# Altium PCB PCB1.PcbDoc
Units mm, origin at the board's own origin, x right, y up, seen from the top; angles counter-clockwise.
Board outline 100 x 68 mm, 2 copper layers (Top Layer, Bottom Layer); 51 components, 54 nets, 211 pads, 15 vias.
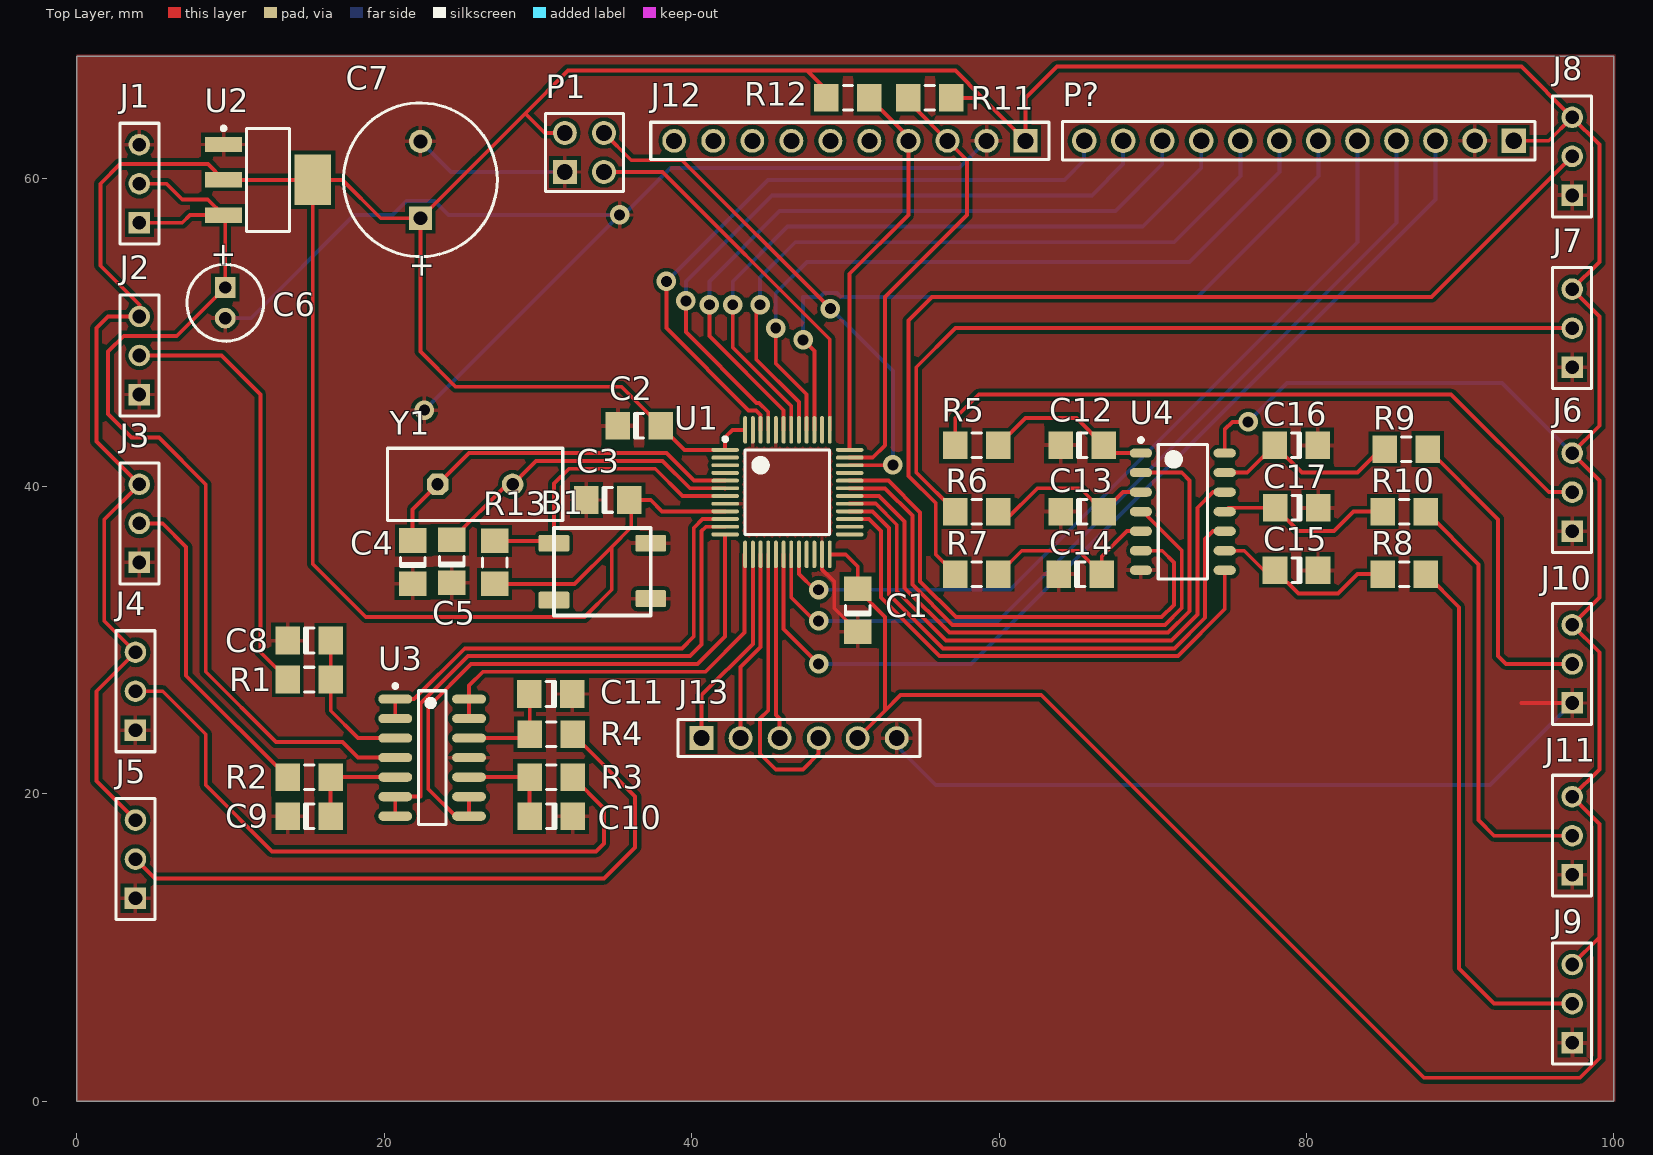
[diagram p0: Top Layer view]
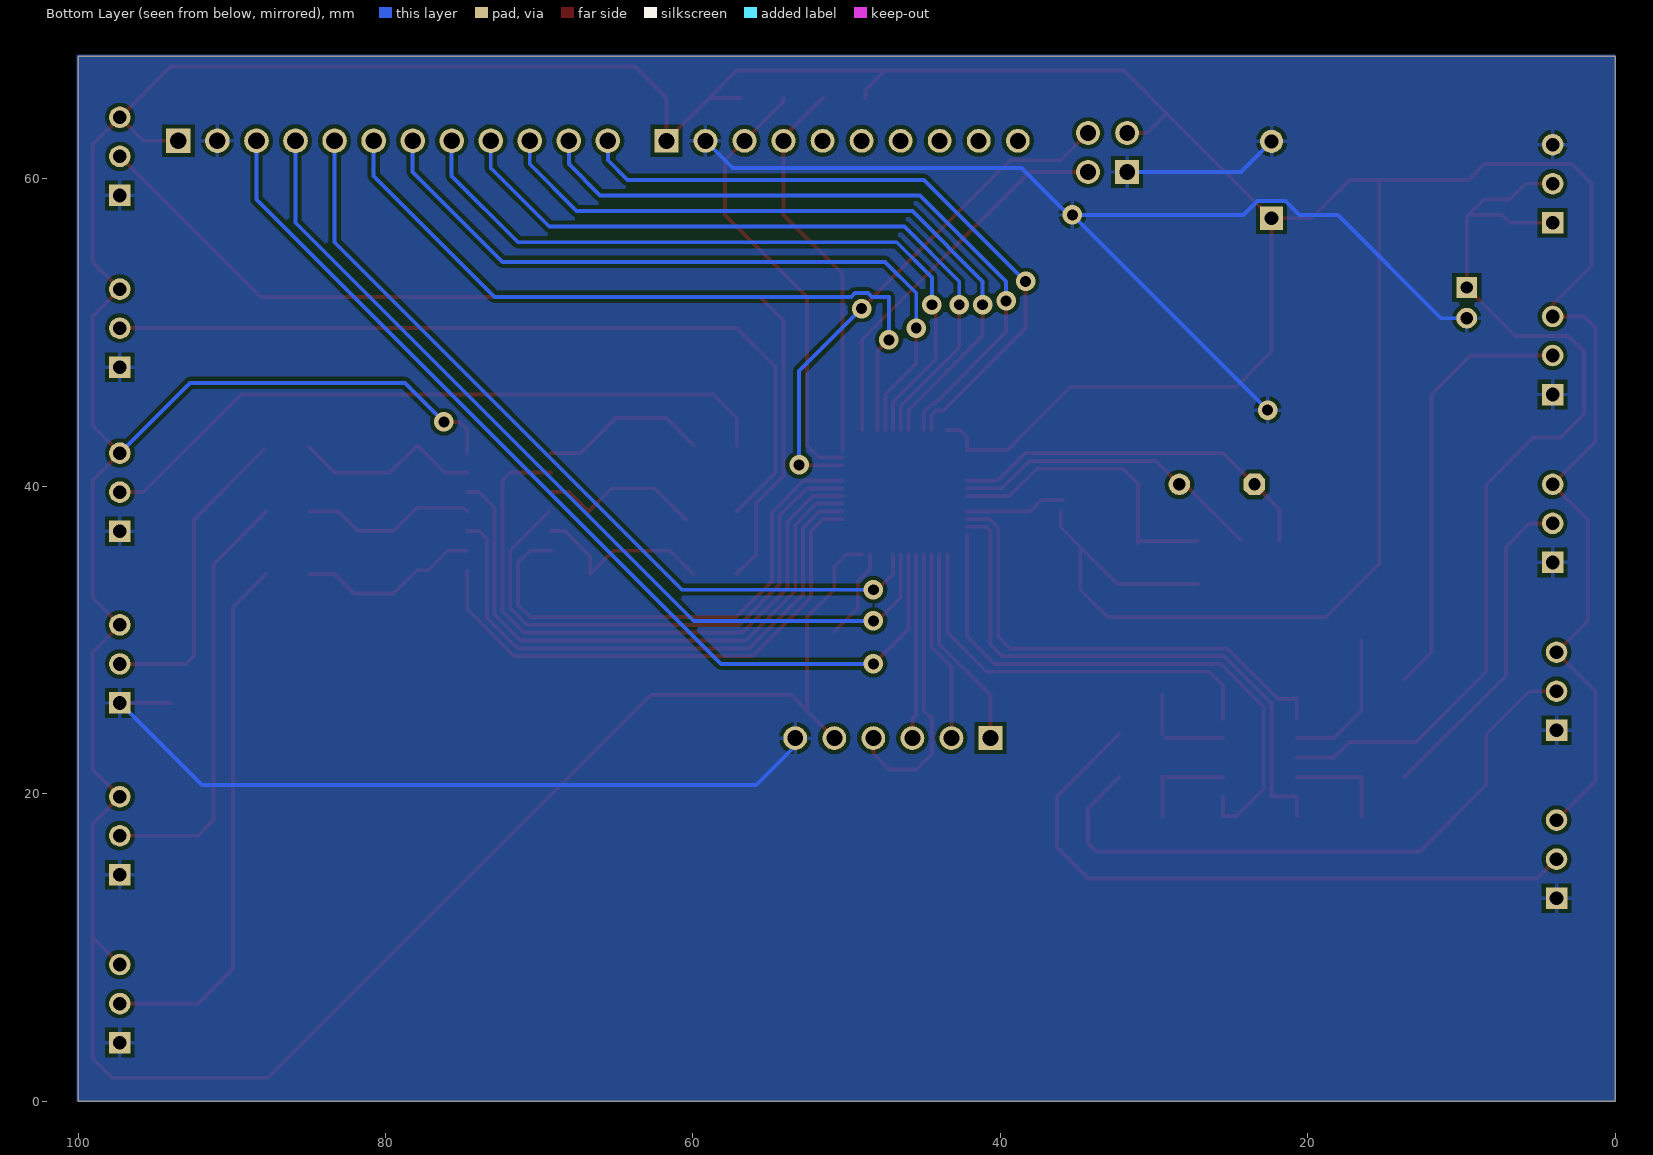
[diagram p1: Bottom Layer view, seen from below]

## Layer stack, top to bottom
Top Solder: solder mask 0.0102, Solder Resist, Dk 3.5
Top Layer: signal copper 0.0356
Dielectric 1: dielectric 0.32, FR-4, Dk 4.8
Bottom Layer: signal copper 0.0356
Bottom Solder: solder mask 0.0102, Solder Resist, Dk 3.5

## Board outline
0,0 100,0 100,67.996 0,67.996

## Design rules (kind name [scope] priority, off if disabled: settings)
Clearance [All] p1: gap=0.254 ignorepadtopadclearanceinfootprint=FALSE except(0: Arc-Hole Track-Hole SMDPad-Hole THPad-Hole Via-Hole Fill-Hole Poly-Hole Region-Hole Text-Hole; 0.2: Arc-Text Track-Text SMDPad-Text THPad-Text Via-Text Fill-Text Poly-Text Region-Text Text-Text; 0.24: Arc-Arc Arc-Track Arc-SMDPad Track-Track Track-SMDPad; 0.25: SMDPad-SMDPad)
PolygonConnect [All] p1: connectstyle=Relief reliefconductorwidth=0.254 reliefentries=4 polygonreliefangle="90 Angle" airgapwidth=0.254
RoutingVias [All] p1: holewidth=0.711 width=1.27 viastyle="Through Hole" minholewidth=0.711 minwidth=1.27 maxholewidth=0.711 maxwidth=1.27
SilkToSilkClearance [All] p1: silktosilkclearance=0.2
SolderMaskExpansion [All] p1: expansion=0
Width [All] p1: maxlimit=0.254 minlimit=0.254 preferedwidth=0.254
29 further rules are at their usual default settings.

## Components (designator, comment, footprint, x,y, rotation, side; value= is the part's Value field where it differs from the comment)
B1 "Reset Button" "SMD Mini Push Button Switch 4 Pin" 31.038,32.601 r0 top
C1 "C1206" 1206 50.8,31.945 r90 top value=100pF
C2 "C1206" 1206 36.576,43.942 r0 top value=100pF
C3 "C1206" 1206 34.544,39.116 r0 top value=100pF
C4 "C1206" 1206 21.844,35.076 r90 top value=22pf
C5 "C1206" 1206 24.384,35.126 r90 top value=22pf
C6 "EKA00AA210L00" CAPPR2-5X11 9.652,51.94 r270 top value=10uF
C7 "EKA00DD222S00" CAPPR5-10X16 22.352,59.944 r90 top value=22uF
C8 "C1206" 1206 15.11,29.972 r0 top value=100pF
C9 "C1206" 1206 15.116,18.542 r0 top value=100pF
C10 "C1206" 1206 30.858,18.542 r180 top value=100pF
C11 "C1206" 1206 30.836,26.492 r180 top value=100pF
C12 "C1206" 1206 65.402,42.672 r0 top value=100pF
C13 "C1206" 1206 65.402,38.354 r0 top value=100pF
C14 "C1206" 1206 65.278,34.29 r0 top value=100pF
C15 "C1206" 1206 79.347,34.544 r180 top value=100pF
C16 "C1206" 1206 79.321,42.672 r180 top value=100pF
C17 "C1206" 1206 79.353,38.608 r180 top value=100pF
J1 "Power" SMTC-BCS-103-X-S-TE 4.064,57.15 r90 top
J2 "Suspension 1" SMTC-BCS-103-X-S-TE 4.064,45.974 r90 top
J3 "Suspension 2" SMTC-BCS-103-X-S-TE 4.064,35.052 r90 top
J4 "Suspension 3" SMTC-BCS-103-X-S-TE 3.81,24.13 r90 top
J5 "Suspension 4" SMTC-BCS-103-X-S-TE 3.81,13.208 r90 top
J6 "BCS-103-L-S-TE" SMTC-BCS-103-X-S-TE 97.282,37.084 r90 top
J7 "BCS-103-L-S-TE" SMTC-BCS-103-X-S-TE 97.282,47.752 r90 top
J8 "BCS-103-L-S-TE" SMTC-BCS-103-X-S-TE 97.282,58.928 r90 top
J9 "BCS-103-L-S-TE" SMTC-BCS-103-X-S-TE 97.282,3.81 r90 top
J10 "BCS-103-L-S-TE" SMTC-BCS-103-X-S-TE 97.282,25.908 r90 top
J11 "BCS-103-L-S-TE" SMTC-BCS-103-X-S-TE 97.282,14.732 r90 top
J12 "MPU9250" SMTC-SSW-110-03-X-S 61.722,62.484 r180 top
J13 "SD Card" SMTC-SSW-106-02-X-S 40.64,23.622 r0 top
P1 "HW-02-12-T-D-750-100" SMTC-HW-02-12-X-D-750-100 31.75,60.452 r0 top
P? "PHT-112-02-L-S" SMTC-PHT-112-02-X-S 93.472,62.484 r180 top
R1 "ERJ8GE" 8-1206 15.116,27.432 r0 top
R2 "ERJ8GE" 8-1206 15.11,21.082 r0 top
R3 "ERJ8GE" 8-1206 30.858,21.082 r180 top
R4 "ERJ8GE" 8-1206 30.864,23.876 r180 top
R5 "ERJ8GE" 8-1206 58.544,42.672 r0 top
R6 "ERJ8GE" 8-1206 58.55,38.354 r0 top
R7 "ERJ8GE" 8-1206 58.55,34.29 r0 top
R8 "ERJ8GE" 8-1206 86.36,34.29 r180 top
R9 "ERJ8GE" 8-1206 86.484,42.418 r180 top
R10 "ERJ8GE" 8-1206 86.36,38.354 r180 top
R11 "ERJ8GE" 8-1206 55.496,65.278 r180 top
R12 "ERJ8GE" 8-1206 50.162,65.278 r0 top
R13 "ERJ8GE" 8-1206 27.178,35.052 r90 top
U1 "STM32F030C6T6" STM-LQFP48_N 46.228,39.624 r0 top
U2 "LD1117AS33TR" SOT-223_N 12.446,59.944 r0 top
U3 "LM324MX" M14A_N 23.114,22.352 r0 top
U4 "SN74HC14D" D0014A_N 71.951,38.354 r0 top
Y1 "ECS-10-13-1" HC-49U 25.908,40.132 r0 top

## Footprints (in the part's own frame and the unit in brackets; to place one, negate y for a bottom-side part, rotate by r counter-clockwise, add the part's x,y. Pads: shape width x height; smd on the part's side, far side on the other; paste and mask are expansions set on the pad)
8-1206 [mm] "Chip Resistor; Body 3.1 x 1.6 mm (LxW typ)"
  rect 1.6x1.8 smd: 1(-1.4,0) 2(1.4,0)
  silkscreen extent -0.3,-0.8 0.3,0.8
1206 [mm] "Chip Capacitor; Body 3.2 x 1.6 mm (LxW typ)"
  rect 1.6x1.8 smd: 1(-1.4,0) 2(1.4,0)
  silkscreen extent -0.3,-0.8 0.3,0.8
CAPPR2-5X11 [mm] "Capacitor, Electrolytic, Radial; Body 5 x 11 mm (Dia.xH typ); Pin Spacing 2 mm (typ)"
  rect 1.35x1.35 hole 0.8: 1(-1,0)
  round 1.35 hole 0.8: 2(1,0)
  silkscreen extent -2.5,-2.5 2.5,2.5
CAPPR5-10X16 [mm] "Capacitor, Electrolytic, Radial; Body 10 x 16 mm (Dia.xH typ); Pin Spacing 5 mm (typ)"
  rect 1.5x1.5 hole 0.9: 1(-2.5,0)
  round 1.5 hole 0.9: 2(2.5,0)
  silkscreen extent -5,-5 5,5
D0014A_N [mm] "SOIC, 14-Leads, Body 8.75x4mm, Pitch 1.27mm, IPC Medium Density"
  oval 1.45x0.6 smd: 1(-2.725,3.81) 2(-2.725,2.54) 3(-2.725,1.27) 4(-2.725,0) 5(-2.725,-1.27) 6(-2.725,-2.54) 7(-2.725,-3.81) 8(2.725,-3.81) 9(2.725,-2.54) 10(2.725,-1.27) 11(2.725,0) 12(2.725,1.27) 13(2.725,2.54) 14(2.725,3.81)
  silkscreen extent -2.85,-4.38 1.6,4.78, body extent -3.02,-4.32 3.02,4.32, height 1.75
HC-49U [mm] "Quartz Crystal, Thru-Hole; 2 Leads; Body 11.35 x 4.65 x 13.46 mm (LxWxH max)"
  oct 1.4x1.4 hole 0.8: 1(-2.44,0)
  round 1.4 hole 0.8: 2(2.44,0)
  silkscreen extent -5.7,-2.35 5.7,2.35
M14A_N [mm] "SOIC, 14-Leads, Body 8.6x3.9mm, Pitch 1.27mm, IPC Medium Density"
  oval 2.2x0.6 smd: 1(-2.4,3.81) 2(-2.4,2.54) 3(-2.4,1.27) 4(-2.4,0) 5(-2.4,-1.27) 6(-2.4,-2.54) 7(-2.4,-3.81) 8(2.4,-3.81) 9(2.4,-2.54) 10(2.4,-1.27) 11(2.4,0) 12(2.4,1.27) 13(2.4,2.54) 14(2.4,3.81)
  silkscreen extent -2.52,-4.35 0.9,4.78, body extent -2,-4.37 2,4.37, height 1.75
"SMD Mini Push Button Switch 4 Pin" [mm]
  rrect20% 2x1.1 smd: 1(0,0) 1(0,3.7) 2(6.3,0.1) 2(6.3,3.7)
  silkscreen extent 0,-1 6.3,4.7
SMTC-BCS-103-X-S-TE [mm] "Box Connector Socket Strip, 1x3 Pins, Vertical, 2.54mm Pitch, Female"
  rect 1.4x1.4 hole 0.89: 1(0,0)
  round 1.4 hole 0.89: 2(2.54,0) 3(5.08,0)
  silkscreen extent -1.4,-1.27 6.48,1.27, body extent -1.27,-1.27 6.35,1.27, height 7.37
SMTC-HW-02-12-X-D-750-100 [mm] "High Temp Terminal Body, 2x2 Pins, Vertical, 2.54mm Pitch, Male"
  rect 1.55x1.55 hole 1.02: 1(0,0)
  round 1.55 hole 1.02: 2(0,2.54) 3(2.54,0) 4(2.54,2.54)
  silkscreen extent -1.27,-1.27 3.81,3.81, body extent -1.27,-1.27 3.81,3.81, height 23.62
SMTC-PHT-112-02-X-S [mm] "Press Fit Socket Assembly, 1x12 Pins, Vertical, 2.54mm Pitch, Male"
  rect 1.6x1.6 hole 1.081: 1(0,0)
  round 1.6 hole 1.081: 2(2.54,0) 3(5.08,0) 4(7.62,0) 5(10.16,0) 6(12.7,0) 7(15.24,0) 8(17.78,0) 9(20.32,0) 10(22.86,0) 11(25.4,0) 12(27.94,0)
  silkscreen extent -1.4,-1.24 29.34,1.24, body extent -1.26,-1.25 29.2,1.25, height 10.92
SMTC-SSW-106-02-X-S [mm] "SQ Post Socket, 1x6 Pins, Vertical, 2.54mm Pitch, Female"
  rect 1.55x1.55 hole 1.04: 1(0,0)
  round 1.55 hole 1.04: 2(2.54,0) 3(5.08,0) 4(7.62,0) 5(10.16,0) 6(12.7,0)
  silkscreen extent -1.53,-1.2 14.23,1.2, body extent -1.52,-1.21 14.22,1.21, height 8.51
SMTC-SSW-110-03-X-S [mm] "SQ Post Socket, 1x10 Pins, Vertical, 2.54mm Pitch, Female"
  rect 1.55x1.55 hole 1.04: 1(0,0)
  round 1.55 hole 1.04: 2(2.54,0) 3(5.08,0) 4(7.62,0) 5(10.16,0) 6(12.7,0) 7(15.24,0) 8(17.78,0) 9(20.32,0) 10(22.86,0)
  silkscreen extent -1.53,-1.2 24.39,1.2, body extent -1.52,-1.21 24.38,1.21, height 8.51
SOT-223_N [mm] "SOT223, 4-Leads, Body 6.5x3.5mm, Pitch 2.3mm, Lead Span 7mm, IPC Medium Density"
  rect 2.4x1 smd: 1(-2.9,2.3) 2(-2.9,0) 3(-2.9,-2.3)
  rect 2.4x3.3 smd: 4(2.9,0)
  silkscreen extent -3.02,-3.35 1.4,3.47, body extent -1.85,-3.35 1.85,3.35, height 1.8
STM-LQFP48_N [mm] "QFP, 48-Leads, Body 7x7mm, Pitch 0.5mm, IPC Medium Density"
  oval 1.8x0.25 smd: 1(-4.05,2.75) 2(-4.05,2.25) 3(-4.05,1.75) 4(-4.05,1.25) 5(-4.05,0.75) 6(-4.05,0.25) 7(-4.05,-0.25) 8(-4.05,-0.75) 9(-4.05,-1.25) 10(-4.05,-1.75) 11(-4.05,-2.25) 12(-4.05,-2.75) 25(4.05,-2.75) 26(4.05,-2.25) 27(4.05,-1.75) 28(4.05,-1.25) 29(4.05,-0.75) 30(4.05,-0.25) 31(4.05,0.25) 32(4.05,0.75) 33(4.05,1.25) 34(4.05,1.75) 35(4.05,2.25) 36(4.05,2.75)
  oval 0.25x1.8 smd: 13(-2.75,-4.05) 14(-2.25,-4.05) 15(-1.75,-4.05) 16(-1.25,-4.05) 17(-0.75,-4.05) 18(-0.25,-4.05) 19(0.25,-4.05) 20(0.75,-4.05) 21(1.25,-4.05) 22(1.75,-4.05) 23(2.25,-4.05) 24(2.75,-4.05) 37(2.75,4.05) 38(2.25,4.05) 39(1.75,4.05) 40(1.25,4.05) 41(0.75,4.05) 42(0.25,4.05) 43(-0.25,4.05) 44(-0.75,4.05) 45(-1.25,4.05) 46(-1.75,4.05) 47(-2.25,4.05) 48(-2.75,4.05)
  silkscreen extent -4.17,-2.75 2.75,3.57, body extent -3.5,-3.5 3.5,3.5, height 1.6

## Part data
B1: library part "SMD Mini Push Button Switch 4 Pin"
C1 C2 C3 C4 C5 C8 C9 C10 C11 C12 C13 C14 C15 C16 C17: "Ceramic Chip Capacitor - Standard", PackageDocument=Mar-2001, Code_IPC="3216 [1206]", Code_JEITA=1206, ComponentLink1Description="Manufacturer Link", ComponentLink1URL=http://www.kemet.com/, ComponentLink2Description=Datasheet, ComponentLink2URL=http://www.kemet.com/kemet/web/homepage/kechome.nsf/vapubfilesname/F3102TA.pdf/$file/F3102TA.pdf, DatasheetDocument=Mar-2001, LatestRevisionDate=19-Mar-2004, LatestRevisionNote="Silkscreen size reduced.", PackageReference=1206, Published=17-Jul-2002, Publisher="Altium Limited"
C6: "Aluminum Electrolytic Capacitor, Radial Style with Long Leads: 10uF, 100V", ComponentLink1Description="Manufacturer Link", ComponentLink1URL=http://www.vishay.com/, ComponentLink2Description=Datasheet, ComponentLink2URL=http://www.vishay.com/docs/25014/eka.pdf, DatasheetDocument=20-Feb-2001, DrillSize="Nominal, Rounded To The Nearest 0.1mm", Note="Refer to Manufacturer's Data Sheets for other lead formations", PackageReference=CAPPR2-5X11, Published=19-Mar-2004, Publisher="Altium Limited"
C7: "Aluminum Electrolytic Capacitor, Radial Style with Long Leads: 22uF, 200V", ComponentLink1Description="Manufacturer Link", ComponentLink1URL=http://www.vishay.com/, ComponentLink2Description=Datasheet, ComponentLink2URL=http://www.vishay.com/docs/25014/eka.pdf, DatasheetDocument=20-Feb-2001, DrillSize="Nominal, Rounded To The Nearest 0.1mm", Note="Refer to Manufacturer's Data Sheets for other lead formations", PackageReference=CAPPR5-10X16, Published=19-Mar-2004, Publisher="Altium Limited"
J1: library part BCS-103-F-S-TE, "Tiger Claw(TM) Pass-Through Socket, Vertical, -55 to 125 degC, 2.54 mm Pitch, 3-Pin, Female, RoHS", Manufacturer=Samtec, Temperature Range="-55 to 125 degC", ComponentLink1Description="Manufacturer URL", ComponentLink1URL=http://www.samtec.com, ComponentLink2Description=Datasheet, ComponentLink2URL=http://www.samtec.com/documents/webfiles/pdf/BCS.PDF, ComponentLink3Description="Package Specification", ComponentLink3URL=http://www.samtec.com/documents/webfiles/cpdf/BCS-1XX-XXX-X-XX-XXX-MKT.pdf, DatasheetVersion=F-214, Mounting Technology=Through-hole, Orientation=Vertical, PackageDescription="Box Connector Socket Strip", PackageReference=BCS-103-X-S-TE, PackageVersion="BV, 9/1991", PartNumber=BCS-103-F-S-TE, Pitch="2.54 mm", RoHS=True
J2 J3 J4 J5: library part BCS-103-L-S-TE, "Tiger Claw(TM) Pass-Through Socket, Vertical, -55 to 125 degC, 2.54 mm Pitch, 3-Pin, Female, RoHS", Manufacturer=Samtec, Supplier Part Number 1=SAM1011-03-ND, Temperature Range="-55 to 125 degC", ComponentLink1Description="Manufacturer URL", ComponentLink1URL=http://www.samtec.com, ComponentLink2Description=Datasheet, ComponentLink2URL=http://www.samtec.com/documents/webfiles/pdf/BCS.PDF, ComponentLink3Description="Package Specification", ComponentLink3URL=http://www.samtec.com/documents/webfiles/cpdf/BCS-1XX-XXX-X-XX-XXX-MKT.pdf, DatasheetVersion=F-214, Mounting Technology=Through-hole, Orientation=Vertical, PackageDescription="Box Connector Socket Strip", PackageReference=BCS-103-X-S-TE, PackageVersion="BV, 9/1991", PartNumber=BCS-103-L-S-TE, Pitch="2.54 mm", RoHS=True, Supplier 1=Digi-Key, Supplier 2=Newark, Supplier Part Number 2=11P3213
J6 J7 J8 J9 J10 J11: "Tiger Claw(TM) Pass-Through Socket, Vertical, -55 to 125 degC, 2.54 mm Pitch, 3-Pin, Female, RoHS", Manufacturer=Samtec, Supplier Part Number 1=SAM1011-03-ND, Temperature Range="-55 to 125 degC", ComponentLink1Description="Manufacturer URL", ComponentLink1URL=http://www.samtec.com, ComponentLink2Description=Datasheet, ComponentLink2URL=http://www.samtec.com/documents/webfiles/pdf/BCS.PDF, ComponentLink3Description="Package Specification", ComponentLink3URL=http://www.samtec.com/documents/webfiles/cpdf/BCS-1XX-XXX-X-XX-XXX-MKT.pdf, DatasheetVersion=F-214, Mounting Technology=Through-hole, Orientation=Vertical, PackageDescription="Box Connector Socket Strip", PackageReference=BCS-103-X-S-TE, PackageVersion="BV, 9/1991", PartNumber=BCS-103-L-S-TE, Pitch="2.54 mm", RoHS=True, Supplier 1=Digi-Key, Supplier 2=Newark, Supplier Part Number 2=11P3213
J12: library part SSW-110-03-T-S, "SQ Post Socket, Through-hole, Vertical, -55 to 105 degC, 2.54 mm Pitch, 10-Pin, Female, RoHS", Manufacturer=Samtec, Temperature Range="-55 to 105 degC", ComponentLink1Description="Manufacturer URL", ComponentLink1URL=http://www.samtec.com, ComponentLink2Description=Datasheet, ComponentLink2URL=http://www.samtec.com/documents/webfiles/pdf/SSW_TH.PDF, ComponentLink3Description="Package Specification", ComponentLink3URL=http://www.samtec.com/documents/webfiles/cpdf/SSW-1XX-XX-XXX-X-XX-XXX-XX-MKT.pdf, DatasheetVersion=F-214, Mounting Technology=Through-hole, Orientation=Vertical, PackageDescription="Assembly, Socket Strip .016 X .031 Tail", PackageReference=SSW-110-03-X-S, PackageVersion="CA, 6/1987", PartNumber=SSW-110-03-T-S, Pitch="2.54 mm", RoHS=True
J13: library part SSW-106-02-T-S, "SQ Post Socket, Through-hole, Vertical, -55 to 105 degC, 2.54mm Pitch, 6-Pin, Female, RoHS", Manufacturer=Samtec, Supplier Part Number 1=SAM1222-06-ND, Temperature Range="-55 to 105 degC", ComponentLink1Description="Manufacturer URL", ComponentLink1URL=http://www.samtec.com, ComponentLink2Description=Datasheet, ComponentLink2URL=http://www.samtec.com/documents/webfiles/pdf/SSW_TH.PDF, ComponentLink3Description="Package Specification", ComponentLink3URL=http://www.samtec.com/documents/webfiles/cpdf/SSW-1XX-XX-XXX-X-XX-XXX-XX-MKT.pdf, DatasheetVersion=F-214, Mounting Technology=Through-hole, Orientation=Vertical, PackageDescription="Assembly, Socket Strip .016 X .031 Tail", PackageReference=SSW-106-02-X-S, PackageVersion="CA, 6/1987", PartNumber=SSW-106-02-T-S, Pitch="2.54 mm", RoHS=True, Supplier 1=Digi-Key, Supplier 2=Newark, Supplier Part Number 2=11P9419
P1: "Flexible .025\" SQ Board Stacker, Through-hole, Vertical, -55 to 105 degC, 2.54 mm Pitch, 4-Pin, Male, RoHS", Manufacturer=Samtec, Temperature Range="-55 to 105 degC", ComponentLink1Description=Datasheet, ComponentLink1URL=http://www.samtec.com/documents/webfiles/pdf/HW_TH.PDF, ComponentLink2Description="Package Specification", ComponentLink2URL=http://www.samtec.com/documents/webfiles/cpdf/HW-XX-XX-XX-X-XXX-XXX-XX-XXX-MKT.pdf, DatasheetVersion=F-214, Mounting Technology=Through-hole, Orientation=Vertical, PackageDescription=".100[2.54] High Temp Terminal Body (Board Stacking)", PackageReference=HW-02-12-X-D-750-100, PackageVersion="Y, 8/1991", PartNumber=HW-02-12-T-D-750-100, Pitch="2.54 mm", RoHS=True
P?: "Press Fit Header, Through-hole, Vertical, -55 to 125 degC, 2.54 mm Pitch, 12-Pin, Male, RoHS", Manufacturer=Samtec, Temperature Range="-55 to 125 degC", ComponentLink1Description="Manufacturer URL", ComponentLink1URL=http://www.samtec.com, ComponentLink2Description=Datasheet, ComponentLink2URL=http://www.samtec.com/documents/webfiles/pdf/pht.pdf, ComponentLink3Description="Package Specification", ComponentLink3URL=http://www.samtec.com/documents/webfiles/cpdf/PHT-1XX-XX-X-X-XXX-MKT.pdf, DatasheetVersion=F-214, Mounting Technology=Through-hole, Orientation=Vertical, PackageDescription=".100 Press Fit Socket Assembly", PackageReference=PHT-112-02-X-S, PackageVersion="J, 9/2009", PartNumber=PHT-112-02-L-S, Pitch="2.54 mm", RoHS=True
R1 R2 R3 R4 R5 R6 R7 R8 R9 R10 R11 R12 R13: "Thick Film Chip Resistor, 1 Ohm to 10M Ohm Range, 5% Tolerance, 1206 Size, 0.25 W", PackageDocument=Mar-2003, Code_IPC="3216 [1206]", ComponentLink1Description="Manufacturer Link", ComponentLink1URL=http://www.panasonic.com/industrial/components/resistive_products.htm, ComponentLink2Description=Datasheet, ComponentLink2URL=http://www.panasonic.com/industrial/components/pdf/AOA0000CE1.pdf, LatestRevisionDate=19-Mar-2004, LatestRevisionNote="Silkscreen size reduced.", Note="If flow soldering, adjust pad width of PCB Footprint to 0.7 - 0.8 times the width of the resistor.", PackageReference=8-1206, Published=17-Dec-2003, Publisher="Altium Limited"
U1: "ARM Cortex-M0 32-bit MCU, 32 KB Flash, 4 KB Internal RAM, 39 I/Os, 48-pin LQFP, -40 to 85 degC, Tray", I/Os (High Current)=39, Operating Frequency(F) (Processor speed) (MHz)=48, Supplier Part Number 1=497-14042-ND, Supply Voltage(Vcc) min (V)=2.4, ComponentLink1Description="Manufacturer URL", ComponentLink1URL=http://www.st.com/web/en/home.html, ComponentLink2Description=Datasheet, ComponentLink2URL=http://www.st.com/st-web-ui/static/active/en/resource/technical/document/datasheet/DM00088500.pdf, ComponentLink3Description="Package Specification", ComponentLink3URL=http://www.st.com/st-web-ui/static/active/en/resource/technical/document/datasheet/DM00058181.pdf, Core="ARM Cortex-M0", DatasheetVersion="Rev. 1", FLASH Size (Prog) (kB)=32, Internal RAM Size (kB)=4, Mounting Technology="Surface Mount", PackageDescription="48-Pin Low Profile Quad Flat Package, 7 x 7 mm Body, 0.5 mm Pitch", PackageReference=LQFP48, PackageVersion="Rev. 6, 06/2013", Packing=Tray, PartNumber=STM32F030C6T6, Supplier 1=Digi-Key, Supplier 2=Newark, Supplier 3=Mouser, Supplier Part Number 2=06X3646, Supplier Part Number 3=511-STM32F030C6T6
U2: "1A, Low Drop Positive Voltage Regulator, 3.3V, 4-Pin SOT-223, Tape and Reel", ComponentLink1Description="Manufacturer URL", ComponentLink1URL=http://www.st.com, ComponentLink2Description=Datasheet, ComponentLink2URL=http://www.st.com/internet/com/TECHNICAL_RESOURCES/TECHNICAL_LITERATURE/DATASHEET/CD00002116.pdf, DatasheetVersion=Dec-2011, PackageDescription="4-Pin SOT-223 Package, 6.5 x 3.5 mm Body, 2.3 mm Pitch, 7 mm Lead Span", PackageReference=SOT-223, PackageVersion=2010, PartNumber=LD1117AS33TR
U3: "Low Power Quad Operational Amplifier, 14-pin Narrow SOIC", Manufacturer="National Semiconductor", PackageTopMarking=NSUZXYTTE#*LM324M, PowerWise=N, Code_IPC=SOIC127P600-14, Code_JEDEC=MS-012AB, ComponentLink1Description="Manufacturer URL", ComponentLink1URL=http://www.national.com/, ComponentLink2Description="LM324 Datasheet", ComponentLink2URL=http://www.national.com/ds/LM/LM324.pdf, ComponentLink3Description="LM324 Web Page", ComponentLink3URL=http://www.national.com/pf/LM/LM324.html, ComponentLink4Description="M14A Package Page", ComponentLink4URL=http://www.national.com/packaging/folders/m14a.html, CompType=Amplifiers, DatasheetVersion=Aug-2000, High-Reliability=Y, PackageDescription="Molded Package S.O., .150in Wide, 14 Lead", PackageReference=M14A, PackageVersion="revJ, Jan-1996", PartNumber=LM324MX, PinCount=14, RoHS=N
U4: "Hex Schmitt-Trigger Inverters, D0014A, TUBE", F @ Nom Voltage(Max)(Mhz)=20, Generic Part Number=SN74HC14, ICC @ Nom Voltage(Max)(mA)=0.02, Manufacturer="Texas Instruments", Operating Temperature Range(C)="-40 to 85", Rating=Catalog, tpd @ Nom Voltage(Max)(ns)=31, Voltage(Nom)(V)=5, Bits(#)=6, ComponentLink1Description="Manufacturer URL", ComponentLink1URL=http://www.ti.com/, ComponentLink2Description=Datasheet, ComponentLink2URL=http://www.ti.com/lit/ds/symlink/sn74hc14.pdf, ComponentLink3Description="Package Specification", ComponentLink3URL=http://www.ti.com/lit/ml/mpds177g/mpds177g.pdf, DatasheetVersion=SCLS085G, Input Type=CMOS, Output Drive (IOL/IOH)(Max)(mA)=-4/4, Output Type=CMOS, PackageReference=D0014A, PartNumber=SN74HC14D, Schmitt Trigger=Yes, Technology Family=HC, VCC(Max)(V)=6, VCC(Min)(V)=2
Y1: "Crystal Oscillator", ComponentLink1Description="Manufacturer Link", ComponentLink1URL=http://www.ecsxtal.com/, ComponentLink2Description=Datasheet, ComponentLink2URL=http://www.ecsxtal.com/pdf2/HC49U.PDF, DatasheetDocument=18-Apr-2000, PackageReference=HC-49U, Published=17-Jul-2002, Publisher="Altium Limited"

## Via types
v1: diameter 1.27, hole 0.711, Top Layer to Bottom Layer, 15 vias

## Nets (pads, with @x,y where several pads share a name; then routed paths per layer and width w, separated by ;. In a path a pad name is that pad's centre, name@x,y a point inside that pad or via, vN(x,y) a via of type N, cw(c..) or ccw(c..) an arc to the next point about the centre after c; other vN are vias at no path point)
3.3V: C1.2 C2.2 C3.2 C7.1 J2.3 J3.3 J4.3 J5.3 J6.3 J7.3 J8.3 J9.3 J10.3 J11.3 J12.1 J13.5 P1.2 P?.1 R11.1 R12.1 R13.1 U1.1 U1.9 U1.24 U1.48 U2.2 U2.4 U4.14 | length 441.4
  Top Layer w0.254: J5.3 1.27,20.828 1.27,26.67 J4.3 1.778,31.242 1.778,37.846 J3.3 1.27,42.926 1.27,50.292 2.032,51.054 J2.3 4.064,51.816 1.524,54.356 1.524,59.69 2.794,60.96 8.53,60.96 U2.2 U2.4 ; R13.1 32.382,33.652 34.798,36.068 ; P1.2 30.44,62.992 29.17,64.262 ; C3.2 37.338,39.116 38.08,38.374 U1.9 ; C3.2@36.068,38.354 36.068,37.338 34.798,36.068 ; U1.48 42.658,43.674 42.178,43.194 U1.1 39.544,42.374 C2.2 35.436,46.482 24.638,46.482 22.352,48.768 C7.1 ; R12.1 48.762,65.792 47.498,67.056 ; U1.24 50.024,35.574 50.8,34.798 C1.2 50.8,33.274 52.578,31.496 52.578,25.4 ; J13.5 52.578,25.4 ; R11.1 58.928,65.278 ; U4.14 74.676,43.688 75.184,44.196 v1(76.2,44.196) ; P?.1 95.758,62.484 J8.3 ; J9.3 99.06,10.668 ; U2.4 17.272,59.944 19.772,57.444 C7.1 ; U2.4 15.346,34.946 18.796,31.496 33.02,31.496 34.798,33.274 34.798,36.068 ; C7.1 29.17,64.262 ; 29.17,64.262 31.964,67.056 47.498,67.056 ; 47.498,67.056 57.15,67.056 58.928,65.278 ; 52.578,25.4 53.594,26.416 62.738,26.416 87.63,1.524 97.79,1.524 99.06,2.794 99.06,10.668 ; 58.928,65.278 J12.1 61.722,65.278 63.754,67.31 93.98,67.31 J8.3 ; J8.3 99.06,62.23 99.06,54.61 J7.3 99.06,51.054 99.06,43.942 J6.3 99.06,40.386 99.06,32.766 J10.3 99.06,29.21 99.06,21.59 J11.3 99.06,18.034 99.06,10.668
  Bottom Layer w0.254: v1(76.2,44.196) 78.74,46.736 92.71,46.736 J6.3
5V: C6.1 J1.1 J1.2 U2.3 U3.4 | length 65.3
  Top Layer w0.254: J1.1 6.858,57.15 7.352,57.644 U2.3 ; J1.2 5.842,59.69 6.858,58.674 8.516,58.674 U2.3 ; U3.4 18.288,22.352 17.272,23.368 12.954,23.368 8.382,27.94 8.382,40.132 5.334,43.18 3.556,43.18 2.032,44.704 2.032,48.768 3.048,49.784 6.496,49.784 C6.1 9.652,57.538 U2.3
CS: J13.1 U1.14 | length 13.3
  Top Layer w0.254: J13.1 40.64,26.416 43.978,29.754 U1.14
digital1: U1.28 U4.10 | length 36.8
  Top Layer w0.254: U1.28 51.752,38.374 52.832,37.294 52.832,32.976 56.344,29.464 71.418,29.464 73.406,31.452 73.406,36.576 73.914,37.084 U4.10
digital2: U1.27 U4.8 | length 34.4
  Top Layer w0.254: U1.27 51.534,37.874 52.324,37.084 52.324,32.766 56.134,28.956 71.628,28.956 74.676,32.004 U4.8
GND: B1.2 C1.1 C2.1 C3.1 C4.1 C5.1 C6.2 C7.2 C8.1 C9.1 C10.1 C11.1 C12.1 C13.1 C14.1 C15.1 C16.1 C17.1 J1.3 J2.1 J3.1 J4.1 J5.1 J6.1 J7.1 J8.1 J9.1 J10.1 J11.1 J12.2 J13.6 P1.1 P?.2 U1.8 U1.23 U1.44 U1.47 U2.1 U3.11 U4.7 | length 140.8
  Top Layer w0.254: J1.3 J1.3@4.078,62.244 ; v1@22.606,44.704 v1(22.606,44.958) ; U1.23 48.484,35.568 48.484,34.597 49.276,33.805 49.276,32.069 C1.1 ; 93.966,25.908 J10.1
  Bottom Layer w0.254: C6.2 11.316,50.94 18.034,57.658 20.527,57.658 21.444,58.575 23.26,58.575 24.177,57.658 35.052,57.658 v1@35.306,57.912 ; C7.2 24.344,60.452 P1.1 ; v1(22.606,44.958) v1(35.306,57.658) v1@35.306,57.912 ; J13.6 53.34,23.114 55.88,20.574 91.948,20.574 J10.1 ; J12.2 57.404,60.706 38.608,60.706 35.814,57.912 v1@35.306,57.912
MISO: J13.4 U1.16 | length 18.9
  Top Layer w0.254: U1.16 44.98,35.572 44.98,25.422 44.45,24.892 44.45,22.606 45.466,21.59 47.244,21.59 48.26,22.606 J13.4
MOSI: J13.3 U1.17 | length 12
  Top Layer w0.254: 45.478,25.134 U1.17 ; 45.486,25.134 45.486,25.126 45.72,24.892 J13.3
NetB1_1: B1.1 R13.2 U1.7 | length 20.1
  Top Layer w0.254: R13.2 30.887,36.452 31.038,36.301 31.038,40.182 32.004,41.148 37.63,41.148 39.408,39.37 42.174,39.37 U1.7
NetC4_2: C4.2 U1.5 Y1.1 | length 24.6
  Top Layer w0.254: C4.2 21.844,38.508 Y1.1 25.5,42.164 38.354,42.164 40.136,40.382 42.17,40.382 U1.5
NetC5_2: C5.2 U1.6 Y1.2 | length 20.7
  Top Layer w0.254: C5.2 27.99,40.132 Y1.2 29.872,41.656 38.1,41.656 39.878,39.878 U1.6
NetC8_2: C8.2 R1.2 U3.3 | length 9.5
  Top Layer w0.254: C8.2@16.516,29.966 R1.2 16.516,25.4 18.294,23.622 U3.3
NetC9_2: C9.2 R2.2 U3.5 | length 6.7
  Top Layer w0.254: C9.2@16.51,18.548 R2.2 U3.5
NetC10_2: C10.2 R3.2 U3.10 | length 6.3
  Top Layer w0.254: U3.10 R3.2@29.315,21.082 ; C10.2 R3.2
NetC11_2: C11.2 R4.2 U3.12 | length 6.3
  Top Layer w0.254: U3.12 R4.2@29.21,23.622 ; R4.2 C11.2@29.464,26.464
NetC12_2: C12.2 R5.2 U4.1 | length 11
  Top Layer w0.254: R5.2 61.722,44.45 65.024,44.45 C12.2 67.31,42.164 U4.1
NetC13_2: C13.2 R6.2 U4.3 | length 10.8
  Top Layer w0.254: R6.2@60.455,37.849 62.484,39.878 65.278,39.878 C13.2 68.072,39.624 U4.3
NetC14_2: C14.2 R7.2 U4.5 | length 12.4
  Top Layer w0.254: R7.2 61.474,35.814 65.154,35.814 C14.2 66.678,35.436 68.326,37.084 U4.5
NetC15_2: C15.2 R8.2 U4.9 | length 12
  Top Layer w0.254: U4.9 75.946,35.814 77.216,34.544 C15.2 79.471,33.02 82.042,33.02 83.312,34.29 R8.2
NetC16_2: C16.2 R9.2 U4.13 | length 12.5
  Top Layer w0.254: U4.13 76.143,40.894 C16.2 79.699,40.894 83.312,40.894 R9.2@84.982,42.564
NetC17_2: C17.2 R10.2 U4.11 | length 11.5
  Top Layer w0.254: U4.11 74.93,38.608 C17.2 79.477,37.084 81.788,37.084 83.058,38.354 R10.2
NetJ2_2: J2.2 R1.1 | length 28.2
  Top Layer w0.254: J2.2 9.398,48.514 11.938,45.974 11.938,29.21 R1.1
NetJ3_2: J3.2 R2.1 | length 21.4
  Top Layer w0.254: J3.2 5.588,37.592 7.112,36.068 7.112,27.68 R2.1
NetJ4_2: J4.2 R3.1 | length 42.1
  Top Layer w0.254: J4.2 5.588,26.67 8.382,23.876 8.382,20.574 12.7,16.256 33.782,16.256 34.29,16.764 34.29,19.05 R3.1
NetJ5_2: J5.2 R4.1 | length 42.9
  Top Layer w0.254: J5.2 5.08,14.478 34.29,14.478 36.322,16.51 36.322,19.818 R4.1
NetJ6_2: J6.2 R5.1 | length 45.4
  Top Layer w0.254: R5.1 57.144,44.444 58.674,45.974 89.408,45.974 95.758,39.624 J6.2 J6.2@97.536,39.624
NetJ7_2: J7.2 R6.1 | length 54.4
  Top Layer w0.254: R6.1 54.61,40.894 54.61,47.752 57.15,50.292 J7.2 J7.2@97.536,50.292
NetJ8_2: J8.2 R7.1 | length 65.6
  Top Layer w0.254: R7.1 55.88,35.56 55.88,38.906 54.102,40.684 54.102,50.8 55.626,52.324 88.138,52.324 J8.2 J8.2@97.536,61.468
NetJ9_2: J9.2 R8.1 | length 34.9
  Top Layer w0.254: R8.1 89.916,32.134 89.916,8.636 92.202,6.35 J9.2
NetJ10_2: J10.2 R9.1 | length 20.4
  Top Layer w0.254: R9.1 92.456,37.846 92.456,28.956 92.964,28.448 J10.2
NetJ11_2: J11.2 R10.1 | length 28
  Top Layer w0.254: R10.1 91.186,34.928 91.186,18.288 92.202,17.272 J11.2
NetP1_3: P1.3 U1.37 | length 25.1
  Top Layer w0.254: P1.3 38.1,60.452 48.978,49.574 U1.37
NetP1_4: P1.4 U1.34 | length 34.1
  Top Layer w0.254: P1.4 36.068,61.214 39.37,61.214 v1(49.022,51.562) ; U1.34 53.058,41.374 v1(53.086,41.402)
  Bottom Layer w0.254: v1(49.022,51.562) 53.086,47.498 v1(53.086,41.402)
SCK: J13.2 U1.15 | length 12.5
  Top Layer w0.254: J13.2 43.18,28.238 44.486,29.544 44.478,29.552 U1.15
SCL: J12.3 R11.2 U1.35 | length 29
  Top Layer w0.254: U1.35 51.78,41.874 52.578,42.672 52.578,52.324 57.912,57.658 57.912,61.214 J12.3 54.096,65.03 R11.2
SDA: J12.4 R12.2 U1.36 | length 25.5
  Top Layer w0.254: U1.36 50.278,53.834 54.102,57.658 J12.4 54.102,62.738 R12.2
speed1: U1.32 U4.6 | length 33
  Top Layer w0.254: U1.32 52.8,40.374 54.864,38.31 54.864,33.818 57.186,31.496 70.576,31.496 71.374,32.294 71.374,35.052 70.612,35.814 U4.6
speed2: U1.31 U4.4 | length 35.7
  Top Layer w0.254: U1.31 52.582,39.874 54.356,38.1 54.356,33.608 56.976,30.988 70.786,30.988 71.882,32.084 71.882,35.816 U4.4@69.344,38.354
speed3: U1.30 U4.2 | length 40.8
  Top Layer w0.254: U1.30 52.189,39.374 53.848,37.715 53.848,33.397 56.765,30.48 70.997,30.48 72.39,31.873 72.39,40.386 71.882,40.894 U4.2
speed4: U1.29 U4.12 | length 38.7
  Top Layer w0.254: U1.29 51.971,38.874 53.34,37.505 53.34,33.187 56.555,29.972 71.207,29.972 72.898,31.663 72.898,38.608 73.914,39.624 U4.12
st1: P?.3 U1.18 | length 64.5
  Top Layer w0.254: U1.18 45.978,30.73 v1(48.26,28.448)
  Bottom Layer w0.254: v1(48.26,28.448) 58.166,28.448 88.392,58.674 P?.3
st2: P?.4 U1.19 | length 58.9
  Top Layer w0.254: U1.19 46.478,32.77 48.006,31.242 v1(48.26,31.242)
  Bottom Layer w0.254: v1(48.26,31.242) 59.944,31.242 85.852,57.15 P?.4
st3: P?.5 U1.20 | length 54
  Top Layer w0.254: U1.20 46.978,34.302 48.006,33.274 v1(48.26,33.274)
  Bottom Layer w0.254: v1(48.26,33.274) 60.706,33.274 83.312,55.88 P?.5
st4: P?.6 U1.39 | length 48.2
  Top Layer w0.254: v1(47.244,49.53) 47.978,48.796 U1.39
  Bottom Layer w0.254: v1(47.244,49.53) 47.244,52.324 48.347,52.324 48.601,52.578 49.443,52.578 49.697,52.324 72.898,52.324 80.772,60.198 P?.6
st5: P?.7 U1.40 | length 47.8
  Top Layer w0.254: v1(45.466,50.292) 45.466,48.006 47.478,45.994 U1.40
  Bottom Layer w0.254: v1(45.466,50.292) 45.466,52.578 47.498,54.61 72.39,54.61 78.232,60.452 P?.7
st6: P?.8 U1.41 | length 47.6
  Top Layer w0.254: v1(44.45,51.816) 44.196,51.816 44.196,48.26 46.978,45.478 U1.41
  Bottom Layer w0.254: v1(44.45,51.816) 44.45,53.594 46.736,55.88 71.374,55.88 75.692,60.198 P?.8
st7: P?.9 U1.42 | length 46.6
  Top Layer w0.254: v1(42.672,51.816) 42.672,49.022 46.478,45.216 U1.42
  Bottom Layer w0.254: v1(42.672,51.816) 42.672,53.34 46.228,56.896 69.342,56.896 73.152,60.706 P?.9
st8: P?.10 U1.43 | length 45.8
  Top Layer w0.254: v1(41.148,51.816) 41.148,49.784 45.978,44.954 U1.43
  Bottom Layer w0.254: v1(41.148,51.816) 41.148,53.34 45.72,57.912 67.564,57.912 70.612,60.96 P?.10
st9: P?.11 U1.45 | length 45.1
  Top Layer w0.254: v1(39.624,52.07) 39.624,50.038 44.227,45.435 44.386,45.435 44.978,44.843 U1.45
  Bottom Layer w0.254: v1(39.624,52.07) 39.624,53.34 45.212,58.928 66.04,58.928 68.072,60.96 P?.11
st10: P?.12 U1.46 | length 44.2
  Top Layer w0.254: v1(38.354,53.34) 38.354,50.292 43.705,44.941 44.182,44.941 44.478,44.645 U1.46
  Bottom Layer w0.254: v1(38.354,53.34) 44.958,59.944 64.262,59.944 65.532,61.214 P?.12
sus1_filtered: U1.10 U3.1 U3.2 | length 31.7
  Top Layer w0.254: U3.2 U3.1 21.931,26.162 25.233,29.464 39.37,29.464 40.132,30.226 40.132,37.294 40.712,37.874 U1.10
sus2_filtered: U1.11 U3.6 U3.7 | length 37.9
  Top Layer w0.254: U3.7 U3.6 22.352,19.812 22.352,25.864 25.444,28.956 39.878,28.956 40.64,29.718 40.64,37.084 40.93,37.374 U1.11
sus3_filtered: U1.12 U3.8 U3.9 | length 37.8
  Top Layer w0.254: U3.9 U3.8 24.638,18.542 22.86,20.32 22.86,25.654 25.654,28.448 40.386,28.448 42.178,30.24 U1.12@42.178,36.843
sus4_filtered: U1.13 U3.13 U3.14 | length 26.6
  Top Layer w0.254: U3.13 U3.14 25.514,27.038 26.416,27.94 40.894,27.94 43.447,30.493 U1.13@43.447,35.574
pads on no net: J12.5 J12.6 J12.7 J12.8 J12.9 J12.10 U1.2 U1.3 U1.4 U1.21 U1.22 U1.25 U1.26 U1.33 U1.38

## Polygon pours and split planes (outlines as drawn)
GND on Bottom Layer "bott gnd" (solid, pour order 30): 0,68.072 100.076,68.072 100.076,0 0,0
GND on Top Layer "bott gnd" (solid, pour order 34): 0,68.072 100.076,68.072 100.076,0 0,0

## Text inside footprints (layer, text, board x,y; h text height)
C6: Top Overlay "+" at 8.902,55.915 h1.5 r270
C7: Top Overlay "+" at 23.102,53.469 h1.5 r90